# Altium PCB Lab9-10.PcbDoc
Units mil, origin at the board's own origin, x right, y up, seen from the top; angles counter-clockwise.
Board outline 6010 x 2810 mil, 4 copper layers (Top Layer, GND, PWR, Bottom Layer), stack 23.756 mil thick; 121 components, 80 nets, 435 pads, 151 vias.
Unrouted connection lines stored in the file: 110.
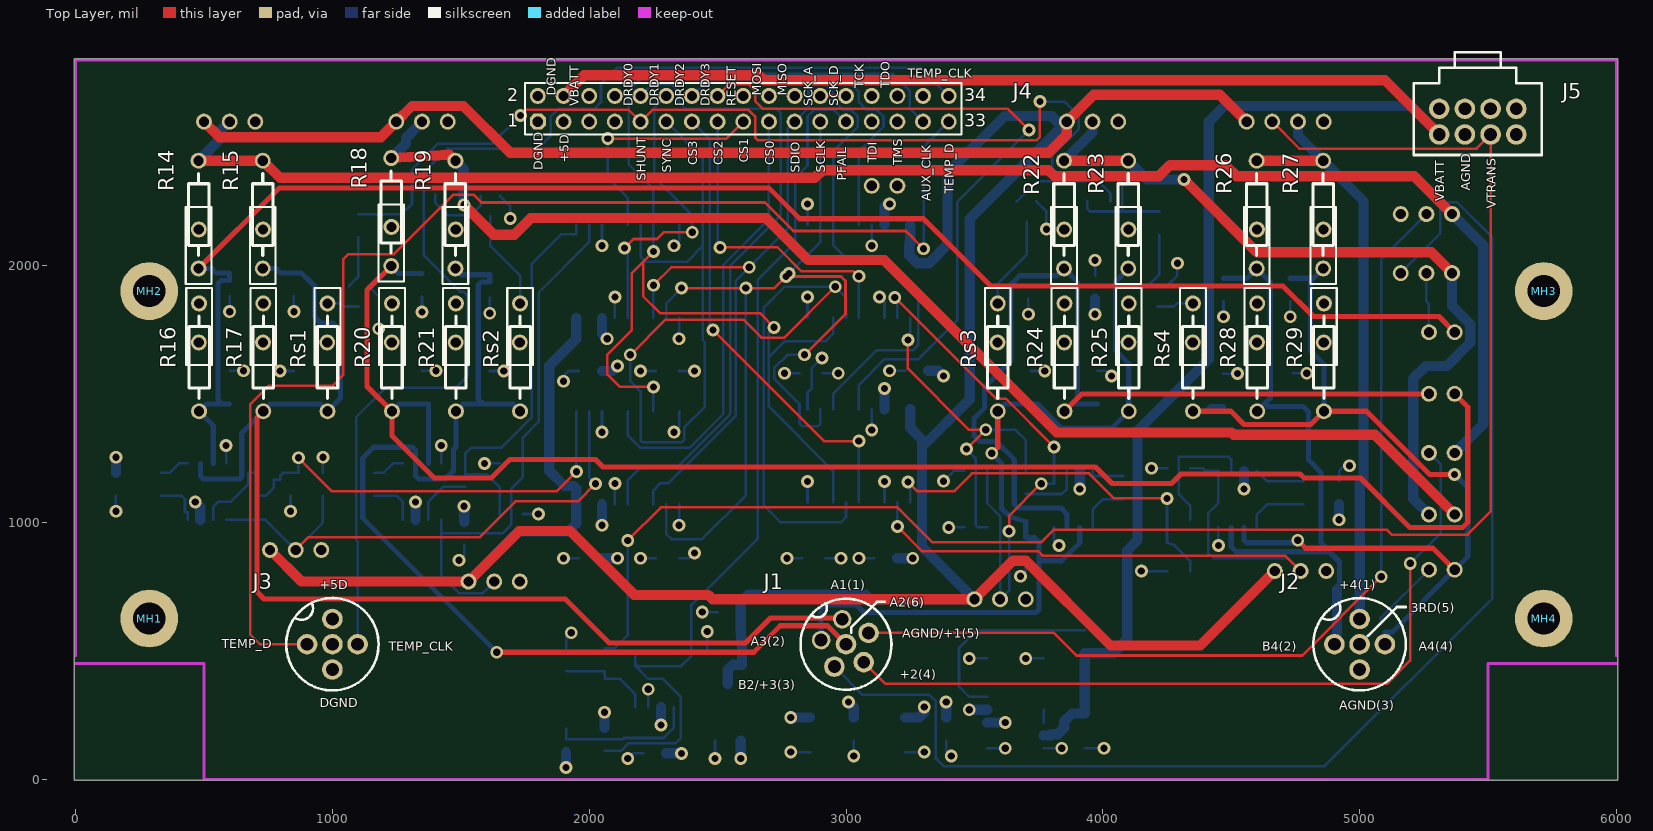
[diagram p0: Top Layer view]
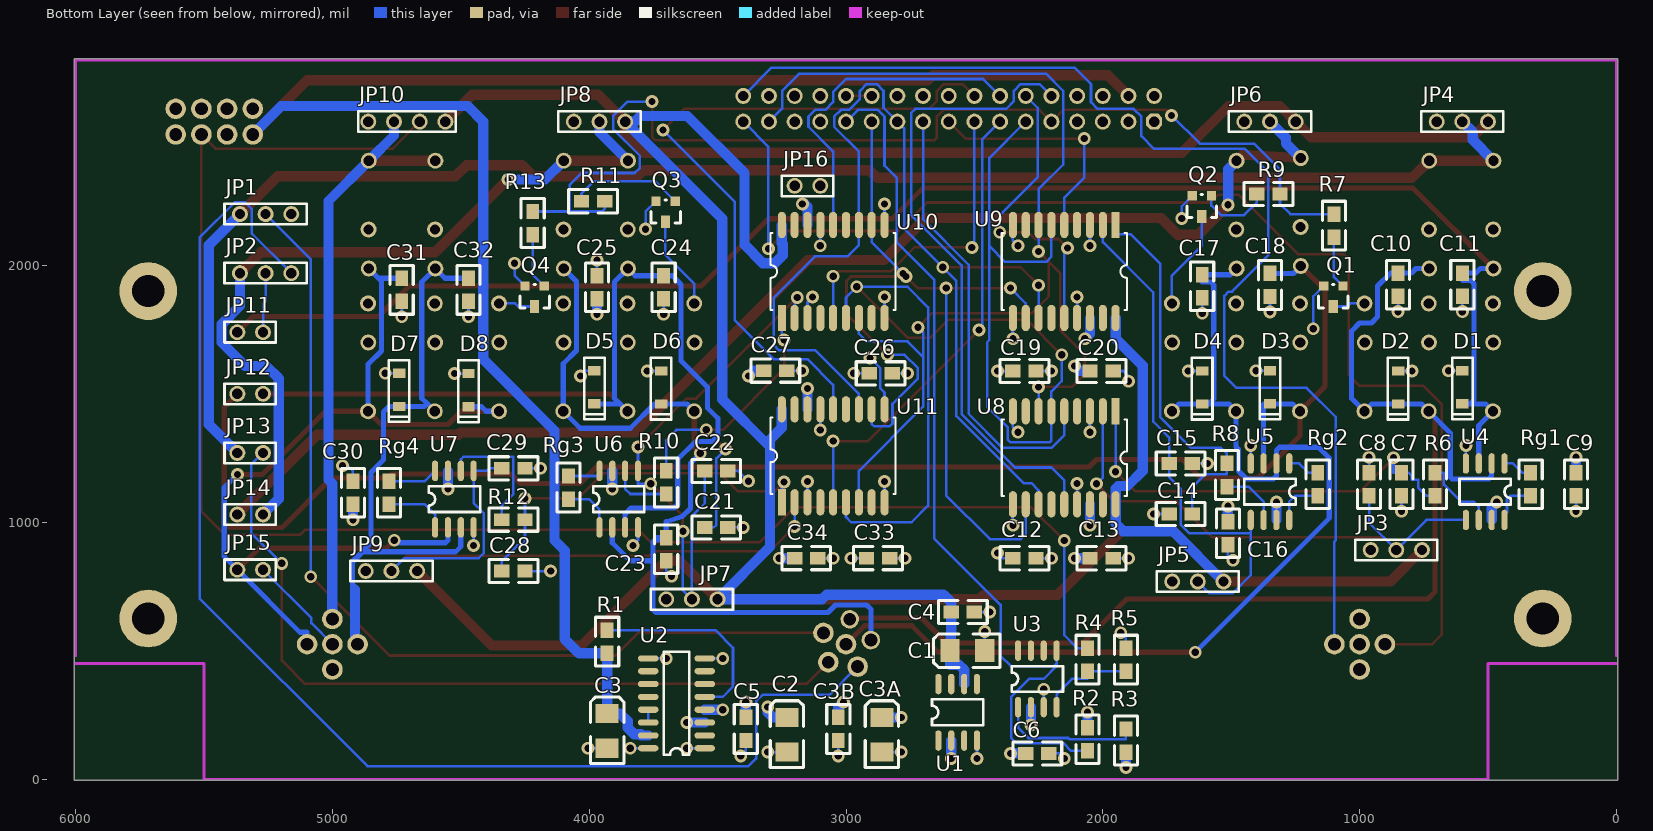
[diagram p1: Bottom Layer view, seen from below]
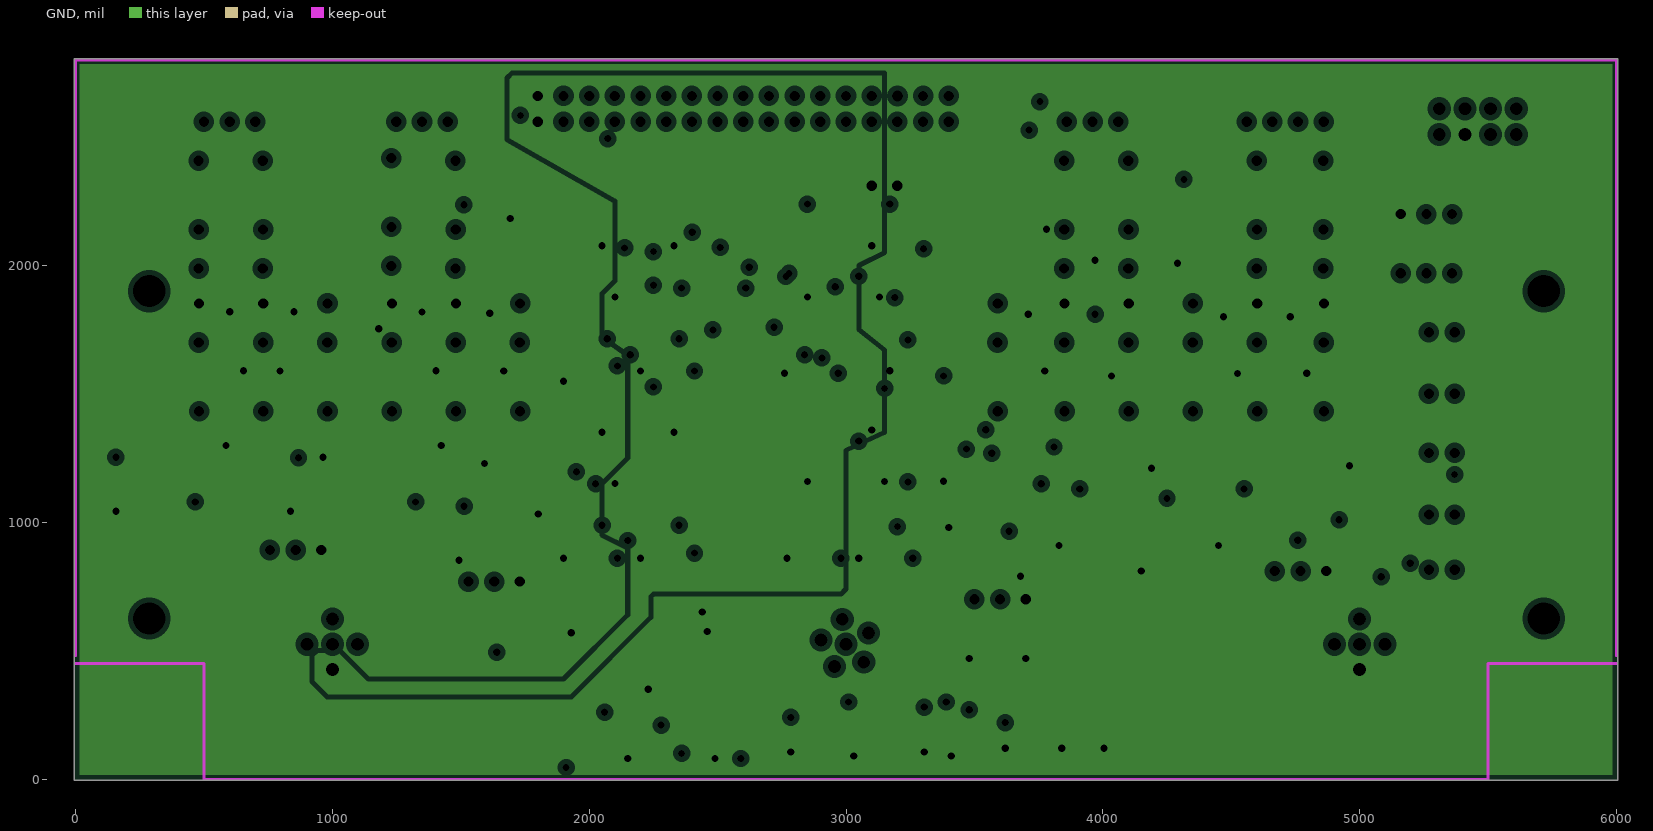
[diagram p2: GND, clearances drawn from the general rule]
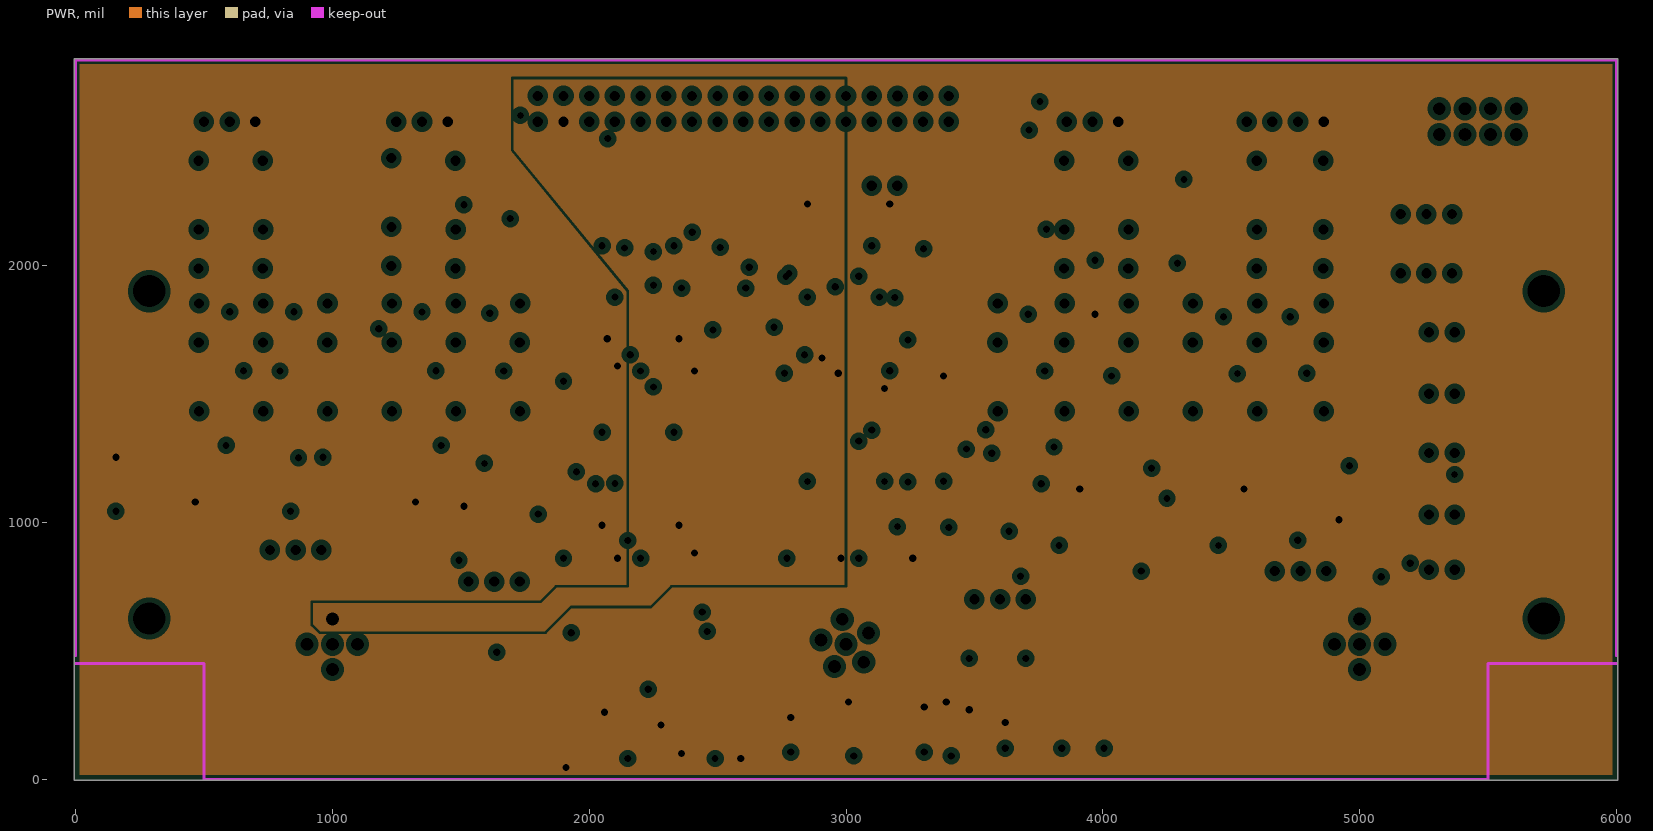
[diagram p3: PWR, clearances drawn from the general rule]

## Layer stack, top to bottom
Top Solder: solder mask 0.4, Solder Resist, Dk 3.5
Top Layer: signal copper 1.4
Dielectric 1: prepreg 2.8, PP-006, Dk 4.1
GND: plane copper 1.378, net AGND
Dielectric1: core 12.6, FR-4, Dk 4.8
PWR: plane copper 1.378, net +5A
Dielectric 2: prepreg 2.8, PP-006, Dk 4.1
Bottom Layer: signal copper 1.4
Bottom Solder: solder mask 0.4, Solder Resist, Dk 3.5

## Board outline
-5,-5 6005,-5 6005,2805 -5,2805

## Design rules (kind name [scope] priority, off if disabled: settings)
Clearance [All] p1: gap=10 ignorepadtopadclearanceinfootprint=TRUE except(0: Arc-Hole Track-Hole SMDPad-Hole THPad-Hole Via-Hole Fill-Hole Poly-Hole Region-Hole Text-Hole)
FabricationTestPointUsage TestPointUsage [All] p1: valid=0 allowmultiple=FALSE
FabricationTestpoint Testpoint [All] p1: side=3 testpointundercomponent=TRUE minsize=40 maxsize=100 preferedsize=60 minholesize=0 maxholesize=40 preferedholesize=32 testpointgrid=1 allowsidetop=TRUE allowsidebottom=TRUE usegrid=TRUE gridtolerance=0.01
PlaneClearance [All] p1: clearance=20
PlaneConnect [All] p1: planeconnectstyle=Relief reliefexpansion=20 reliefentries=4 reliefconductorwidth=10 reliefairgap=10
PolygonConnect [All] p1: connectstyle=Relief reliefconductorwidth=10 reliefentries=4 polygonreliefangle="90 Angle" airgapwidth=10
RoutingVias [All] p1: holewidth=28 width=50 viastyle="Through Hole" minholewidth=28 minwidth=50 maxholewidth=28 maxwidth=50
SilkToSolderMaskClearance SilkscreenOverComponentPads [IsPad] p1: minsilkscreentomaskgap=10 clearancetoexposedcopper=TRUE
SolderMaskExpansion [All] p1: expansion=4 istentingtop=FALSE
Width Power [InNetClass('Power')] p1: maxlimit=40 minlimit=40 preferedwidth=40
Width 2.5V_REF [InNetClass('2.5V_REF')] p2: maxlimit=40 minlimit=20 preferedwidth=40
Width Digital [InNetClass('Digital')] p3: maxlimit=10 minlimit=10 preferedwidth=10
Width Analog [InNetClass('Analog')] p4: maxlimit=40 minlimit=20 preferedwidth=20
Width Basic [All] p5: maxlimit=40 minlimit=10 preferedwidth=10
25 further rules are at their usual default settings.

## Classes and differential pairs
net class Power: +4 +5A NetJP1_1 NetJP2_1 NetJP6_2 VBATT
net class Digital: !CS0 !CS1 !CS2 !CS3 !DB_PFAIL !DRDY0 !DRDY1 !DRDY2 !DRDY3 !DSYNC AUX_CLK SCK_A SCLK SDIO SHUNT_EN TEMP_CLK TEMP_D Vtrans
net class Analog: A1 A2 A3 A4 B4 NetC11_1 NetC18_1 NetC24_1
net class 2.5V_REF: 2.5VREF
component class Lab7-8_TOP: C1 C2 C3 C3A C3B C4 C5 C6 J1 J2 J3 J4 J5 JP1 JP2 JP11 JP12 JP13 JP14 JP15 JP16 MH1 MH2 MH3 MH4 R1 R2 R3 R4 R5 U1 U2 U3
component class CHANNEL4: C28 C29 C30 C31 C32 C33 C34 D7 D8 JP9 JP10 Q4 R12 R13 R26 R27 R28 R29 Rg4 Rs4 U7 U11
component class CHANNEL3: C21 C22 C23 C24 C25 C26 C27 D5 D6 JP7 JP8 Q3 R10 R11 R22 R23 R24 R25 Rg3 Rs3 U6 U10
component class CHANNEL2: C14 C15 C16 C17 C18 C19 C20 D3 D4 JP5 JP6 Q2 R8 R9 R18 R19 R20 R21 Rg2 Rs2 U5 U9
component class CHANNEL1: C7 C8 C9 C10 C11 C12 C13 D1 D2 JP3 JP4 Q1 R6 R7 R14 R15 R16 R17 Rg1 Rs1 U4 U8

## Components (designator, comment, footprint, x,y, rotation, side; value= is the part's Value field where it differs from the comment)
C1 "1uF" 3528 2595,500 r180 bottom
C2 "10uF" 3528 3230,240 r270 bottom
C3 "1uF" 3528 3930,255 r270 bottom
C3A "2.2uF" 3528 2860,240 r270 bottom
C3B "0.1uF" 0805 3030,240 r270 bottom
C4 "0.1uF" 0805 2590,650 r180 bottom
C5 "0.1uF" 0805 3390,240 r270 bottom
C6 "0.1uF" 0805 2300,100 r180 bottom
C7 "0.1uF" 0805 837,1193 r270 bottom
C8 "0.1uF" 0805 963,1103 r90 bottom
C9 "0.1uF" 0805 157,1193 r270 bottom
C10 "0.1uF" 0805 850,1970 r270 bottom
C11 "0.1uF" 0805 600,1970 r270 bottom
C12 "0.1uF" 0805 2350,859.8 r180 bottom
C13 "0.1uF" 0805 2050,859.8 r180 bottom
C14 "0.1uF" 0805 1652,1032 r0 bottom
C15 "0.1uF" 0805 1742,1229 r180 bottom
C16 "0.1uF" 0805 1513,1002 r270 bottom
C17 "0.1uF" 0805 1613,1964 r270 bottom
C18 "0.1uF" 0805 1349,1969 r270 bottom
C19 "0.1uF" 0805 2350,1589 r180 bottom
C20 "0.1uF" 0805 2050,1589 r180 bottom
C21 "0.1uF" 0805 3550,980 r180 bottom
C22 "0.1uF" 0805 3550,1200 r180 bottom
C23 "0.1uF" 0805 3700,940 r270 bottom
C24 "0.1uF" 0805 3710,1960 r270 bottom
C25 "0.1uF" 0805 3970,1870 r90 bottom
C26 "0.1uF" 0805 2910,1580 r180 bottom
C27 "0.1uF" 0805 3320,1590 r180 bottom
C28 "0.1uF" 0805 4340,810 r180 bottom
C29 "0.1uF" 0805 4340,1210 r180 bottom
C30 "0.1uF" 0805 4920,1070 r90 bottom
C31 "0.1uF" 0805 4730,1950 r270 bottom
C32 "0.1uF" 0805 4470,1950 r270 bottom
C33 "0.1uF" 0805 2920,860 r180 bottom
C34 "0.1uF" 0805 3200,860 r180 bottom
D1 "6V2" SOD-123 600,1590 r0 bottom
D2 "6V2" SOD-123 850,1589 r0 bottom
D3 "6V2" SOD-123 1349,1590 r0 bottom
D4 "6V2" SOD-123 1613,1589 r0 bottom
D5 "6V2" SOD-123 3980,1590 r0 bottom
D6 "6V2" SOD-123 3720,1589 r0 bottom
D7 "6V2" SOD-123 4740,1580 r0 bottom
D8 "6V2" SOD-123 4470,1579 r0 bottom
J1 "CON6" FSFD4.6 3000,525 r0 top locked
J2 "CON5" FSFD4.5 5000,525 r0 top locked
J3 "CON5" FSFD4.5 1000,525 r0 top locked
J4 "HEADER 17X2" HDR2X17 1800,2560 r0 top locked
J5 "HEAD 4" 70543-4A 5460,2610 r0 top locked
JP1 "HOLE 3" RAD0.1A 5360,2200 r270 bottom
JP2 "HOLE 3" RAD0.1A 5360,1970 r270 bottom
JP3 "HOLE 3" RAD0.1A 957,892 r270 bottom
JP4 "HOLE 3" RAD0.1A 700,2560 r270 bottom
JP5 "HOLE 3" RAD0.1A 1730,769 r270 bottom
JP6 "HOLE 3" RAD0.1A 1449,2560 r270 bottom
JP7 "HOLE 3" RAD0.1A 3700,700 r270 bottom
JP8 "HOLE 3" RAD0.1A 4060,2560 r270 bottom
JP9 "HOLE 3" RAD0.1A 4870,810 r270 bottom
JP10 "HOLE 4" RAD0.1B 4860,2560 r270 bottom
JP11 "HOLE 2" RAD0.1 5370,1740 r270 bottom
JP12 "HOLE 2" RAD0.1 5370,1500 r270 bottom
JP13 "HOLE 2" RAD0.1 5370,1270 r270 bottom
JP14 "HOLE 2" RAD0.1 5370,1030 r270 bottom
JP15 "HOLE 2" RAD0.1 5370,815 r270 bottom
JP16 "HOLE 2" RAD0.1 3100,2310 r90 bottom
MH1 "Mount-Hole" "screw 4-40"#1 110,1450 r0 top locked
MH2 "Mount-Hole" "screw 4-40"#2 60,3190 r0 top locked
MH3 "Mount-Hole" "screw 4-40"#3 5680,2620 r0 top locked
MH4 "Mount-Hole" "screw 4-40"#4 5710,1620 r0 top locked
Q1 "MOSFET-N1" SOT-23 1065,1920 r180 bottom
Q2 "MOSFET-N1" SOT-23 1577,2271 r180 bottom
Q3 "MOSFET-N1" SOT-23 3665,2250 r180 bottom
Q4 "MOSFET-N1" SOT-23 4175,1920 r180 bottom
R1 "100K" 0805 3930,580 r270 bottom
R2 "10K" 0805 2060,110 r90 bottom
R3 "2.2K" 0805 1910,105 r90 bottom
R4 "y" 0805 2060,510 r270 bottom
R5 "x" 0805 1910,420 r90 bottom
R6 "1K2" 0805 707,1193 r270 bottom
R7 "4K7" 0805 1100,2110 r90 bottom
R8 "1K2" 0805 1517,1139 r90 bottom
R9 "4K7" 0805 1400,2278 r180 bottom
R10 "1K2" 0805 3700,1110 r90 bottom
R11 "4K7" 0805 4030,2250 r180 bottom
R12 "1K2" 0805 4340,1010 r180 bottom
R13 "4K7" 0805 4220,2120 r90 bottom
R14 "bridge R" "bridge resistor" 480,1980 r0 top locked
R15 "bridge R" "bridge resistor" 730,1980 r0 top locked
R16 "bridge R" "bridge resistor" 480,1860 r180 top locked
R17 "bridge R" "bridge resistor" 730,1860 r180 top locked
R18 "bridge R" "bridge resistor" 1230,1990 r0 top locked
R19 "bridge R" "bridge resistor" 1480,1980 r0 top locked
R20 "bridge R" "bridge resistor" 1231,1860 r180 top locked
R21 "bridge R" "bridge resistor" 1480,1860 r180 top locked
R22 "bridge R" "bridge resistor" 3850,1980 r0 top locked
R23 "bridge R" "bridge resistor" 4100,1980 r0 top locked
R24 "bridge R" "bridge resistor" 3850,1860 r180 top locked
R25 "bridge R" "bridge resistor" 4100,1860 r180 top locked
R26 "bridge R" "bridge resistor" 4600,1980 r0 top locked
R27 "bridge R" "bridge resistor" 4859,1980 r0 top locked
R28 "bridge R" "bridge resistor" 4600,1860 r180 top locked
R29 "bridge R" "bridge resistor" 4860,1860 r180 top locked
Rg1 "Rg1" 0805 334,1103 r90 bottom
Rg2 "Rg2" 0805 1163,1103 r90 bottom
Rg3 "Rg3" 0805 4080,1180 r270 bottom
Rg4 "Rg4" 0805 4780,1160 r270 bottom
Rs1 "bridge R" "bridge resistor" 980,1860 r180 top locked
Rs2 "bridge R" "bridge resistor" 1730,1860 r180 top locked
Rs3 "bridge R" "bridge resistor" 3590,1860 r180 top locked
Rs4 "bridge R" "bridge resistor" 4350,1860 r180 top locked
U1 "REF192ES" SO-8 2640,150 r180 bottom
U2 "LP2952AIM" SO-16 3550,120 r0 bottom
U3 "DS1707" SO-8 2330,280 r180 bottom
U4 "INA118" SO-8 436,1229 r0 bottom
U5 "INA118" SO-8 1274,1229 r0 bottom
U6 "INA118" SO-8 3960,980 r180 bottom
U7 "INA118" SO-8 4600,980 r180 bottom
U8 "ADS1212U" SOIC18 1950,1432 r0 bottom
U9 "ADS1212U" SOIC18 1950,2157.8 r0 bottom
U10 "ADS1212U" SOIC18 3250,1795.59 r180 bottom
U11 "ADS1212U" SOIC18 3250,1077.59 r180 bottom

## Footprints (in the part's own frame and the unit in brackets; to place one, negate y for a bottom-side part, rotate by r counter-clockwise, add the part's x,y. Pads: shape width x height; smd on the part's side, far side on the other; paste and mask are expansions set on the pad)
0805 [mil]
  rect 60x50 smd: 1(0,0) 2(90,0)
  silkscreen extent -50,-45 140,45
3528 [mil]
  rect 75x90 smd: 1(0,0) 2(135,0)
  silkscreen extent -65,-65 195,65
70543-4A [mil]
  round 80 hole 50: 1(-150,-100) 1a(-150,0) 2(-50,-100) 2a(-50,0) 3(50,-100) 3a(50,0) 4(150,-100) 4a(150,0)
  silkscreen extent -250,-180 250,220
"bridge resistor" [mil]
  round 62 hole 40: 1(-1,8) 2(-1,428) ""(0,160)
  silkscreen extent -51,-52 49,378
FSFD4.5 [mil]
  round 80 hole 50: 1(0,98.43) 2(-98.42,0) 3(0,-98.42) 4(98.43,0) 5(0,0)
  silkscreen extent -180,-180 180,180
FSFD4.6 [mil]
  round 72 hole 50: 1(-14.66,97.03) 2(-96.81,16.04)
  round 80 hole 50: 3(-45.17,-87.12) 4(68.9,-69.88) 5(87.75,43.93) 6(0,0)
  silkscreen extent -177,-177 177,177
HDR2X17 [mil]
  oct 62x62 hole 40: 1(0,0)
  round 62 hole 40: 2(0,100) 3(100,0) 4(100,100) 5(200,0) 6(200,100) 7(300,0) 8(300,100) 9(400,0) 10(400,100) 11(500,0) 12(500,100) 13(600,0) 14(600,100) 15(700,0) 16(700,100) 17(800,0) 18(800,100) 19(900,0) 20(900,100) 21(1000,0) 22(1000,100) 23(1100,0) 24(1100,100) 25(1200,0) 26(1200,100) 27(1300,0) 28(1300,100) 29(1400,0) 31(1500,0) 32(1500,100) 33(1600,0) 34(1600,100)
  round 62 hole 42: 30(1400,100)
  silkscreen extent -50,-50 1650,150
RAD0.1 [mil]
  round 62 hole 40: 1(0,0) 2(0,100)
  silkscreen extent -40,-50 40,150
RAD0.1A [mil]
  round 62 hole 40: 1(0,0) 2(0,100) 3(0,200)
  silkscreen extent -40,-60 40,260
RAD0.1B [mil]
  round 62 hole 40: 1(0,0) 2(0,100) 3(0,200) 4(0,300)
  silkscreen extent -40,-40 40,340
"screw 4-40"#1 [mil]
  round 225 hole 125: 4-40(177,-825)
"screw 4-40"#2 [mil]
  round 225 hole 125: 4-40(227,-1290)
"screw 4-40"#3 [mil]
  round 225 hole 125: 4-40(37,-720)
"screw 4-40"#4 [mil]
  round 225 hole 125: 4-40(7,-995)
SO-8 [mil]
  oval 24x80 smd: 1(0,0) 2(50,0) 3(100,0) 4(150,0) 5(150,220) 6(100,220) 7(50,220) 8(0,220)
  silkscreen extent -25,60 175,160
SO-16 [mil]
  oval 80x24 smd: 1(0,0) 2(0,-50) 3(0,-100) 4(0,-150) 5(0,-200) 6(0,-250) 7(0,-300) 8(0,-350) 9(220,-350) 10(220,-300) 11(220,-250) 12(220,-200) 13(220,-150) 14(220,-100) 15(220,-50) 16(220,0)
  silkscreen extent 60,-375 160,25
SOD-123 [mil]
  rect 48x36 smd: A(0,0) K(0,129)
  silkscreen extent -40,-51 40,189
SOIC18 [mm]
  rect 0.8x2.6 smd: 1(0,0)
  oval 0.8x2.6 smd: 2(1.27,0) 3(2.54,0) 4(3.81,0) 5(5.08,0) 6(6.35,0) 7(7.62,0) 8(8.89,0) 9(10.16,0) 10(10.16,9.2) 11(8.89,9.2) 12(7.62,9.2) 13(6.35,9.2) 14(5.08,9.2) 15(3.81,9.2) 16(2.54,9.2) 17(1.27,9.2) 18(0,9.2)
  silkscreen extent -1.11,0.8 11.27,8.4
SOT-23 [mil]
  rect 36x36 smd: 1(0,0) 2(-75,0)
  rect 36x50 smd: 3(-38,-80)
  silkscreen extent -95,-85 20,5

## Part data
C1 C2 C3 C3A: library part "CAPACITOR POL", Part Field 1=TANT
C3B C4 C5 C6 C7 C8 C9 C10 C11 C12 C13 C14 C15 C16 C17 C18 C19 C20 C21 C22 C23 C24 C25 C26 C27 C28 C29 C30 C31 C32 C33 C34: library part CAP
D1 D2 D3 D4 D5 D6 D7 D8: library part ZENER3
J4: library part "HEADER 2X17"
J5: library part "HEADER 4"
MH1 MH2 MH3 MH4: library part MountHole, "Mount hole", LatestRevisionDate=17-Jul-2002, LatestRevisionNote="Re-released for DXP Platform.", Publisher="Altium Limited"
R1 R2 R3 R4 R5 R6 R7 R8 R9 R10 R11 R12 R13 Rg1 Rg2 Rg3 Rg4: library part RES1
R14 R15 R16 R17 R18 R19 R20 R21 R22 R23 R24 R25 R26 R27 R28 R29 Rs1 Rs2 Rs3 Rs4: library part RES2
U4 U5 U6 U7: "Precision, Low Power Instrumentation Amplifier"
U8 U9 U10 U11: library part ADS1212U(18), "22-Bit Analog-to-Digital Converter"

## Via types
v1: diameter 50, hole 28, Top Layer to Bottom Layer, 151 vias

## Nets (pads, with @x,y where several pads share a name; then routed paths per layer and width w, separated by ;. In a path a pad name is that pad's centre, name@x,y a point inside that pad or via, vN(x,y) a via of type N, cw(c..) or ccw(c..) an arc to the next point about the centre after c; other vN are vias at no path point)
2.5VREF: C1.1 C4.1 JP3.3 JP4.3 JP5.3 JP6.3 JP7.3 JP8.3 JP9.3 JP10.4 U1.6 U8.18 U9.18 U10.18 U11.18 | length 15066.6
  Top Layer w40: JP4.3 561,2499 1188,2499 JP6.3 1310,2621 1510,2621 1692,2439 3789.88,2439 3860,2509.12 JP8.3 3965,2665 4455,2665 JP10.4 ; JP3.3 880,769 JP5.3 1727,966 1926,966 2175,717 2463,717 2480,700 JP7.3 3650,850 3700,850 4030,520 4380,520 JP9.3
  Bottom Layer w40: JP5.3 1726,965 1920,965 1950,995 U8.18 1950,1131 1940,1141 1904,1141 1845,1200 1845,1610 1950,1715 U9.18 ; U1.6 2540,425 2560,445 2595,445 C1.1 2590,580 C4.1 2590,688.03 2620,718.03 3076,718.03 3094.03,700 JP7.3 3296,904 3296,1293 ; U11.18 3250,1368 3296,1322 3296,1293 ; U10.18 3250,2086 3246,2082 3246,2040 3277,2009 3324,2009 3395,2080 3395,2359 3618,2582 3801,2582 3823,2560 JP8.3 3482,2182 3482,1479 3296,1293
3RD: J2.5 JP15.2 | length 401.8
  Bottom Layer w10: J2.5 5082,607 5082,627 JP15.2
!CS0: J4.19 U8.5 | length 1751.1
  Bottom Layer w10: U8.5 2150,1340 2200,1290 2390,1290 2522,1422 2522,2002 2700,2180 J4.19
!CS1: J4.17 U9.5 | length 923.9
  Top Layer w10: v1(2072,2494) 2534,2494 J4.17
  Bottom Layer w10: v1(2072,2494) 2072,2342 2150,2264 U9.5
!CS2: J4.15 U10.5 | length 1242.9
  Top Layer w10: v1(2510,2070) 2734.23,2070 2827.23,1977 3031,1977 v1(3050,1958)
  Bottom Layer w10: J4.15 2500,2080 v1(2510,2070) ; U10.5 v1(3050,1958)
!CS3: J4.13 U11.5 | length 1830.7
  Top Layer w10: v1(2482,1749) 2915,1316 v1(3050,1316)
  Bottom Layer w10: J4.13 2470,2490 2470,1761 v1(2482,1749) ; U11.5 v1(3050,1316)
!DB_PFAIL: J4.25 R2.1 U3.5 | length 3470.2
  Bottom Layer w10: R2.1 2123,110 2153,140 2337,140 2357,160 2357,320 2287,390 2230,390 2180,440 2180,450 ; U3.5 2180,450 ; J4.25 2954,2606 2876,2606 2850,2580 2850,2389 2802,2341 2802,2090 2657,1945 2657,937 2398,678 2398,480 2358,440 2190,440 2180,450
!DRDY0: J4.10 U8.14 | length 2488.9
  Bottom Layer w10: U8.14 2150,1163.28 2200,1213.28 2341.57,1213.28 2550,1421.71 2550,2000 2746,2196 2746,2594 2730,2610 2376,2610 2346,2640 2346,2680 2320,2706 2246,2706 J4.10
!DRDY1: J4.12 U9.14 | length 1176.6
  Top Layer w10: v1(2138,2068) 2173,2103 2264,2103 2290,2129 v1(2401,2129)
  Bottom Layer w10: v1(2138,2068) 2150,2056 U9.14 ; J4.12 2254,2614 2254,2343 2401,2196 v1(2401,2129)
!DRDY2: J4.14 U10.14 | length 1319.2
  Bottom Layer w10: J4.14 2466,2726 3000,2726 3050,2676 3050,2636 3080,2606 3120,2606 3146,2580 3146,2540 3050,2444 U10.14
!DRDY3: J4.16 U11.14 | length 2768.8
  Top Layer w10: J4.16 2546,2706 2620,2706 2646,2680 2646,2640 2676,2610 3630,2610 v1(3713,2527)
  Bottom Layer w10: U11.14 3050,1535 3150,1635 3282,1635 3433,1786 3433,2247 v1(3713,2527)
!DSYNC: J4.11 U8.6 U9.6 U10.6 U11.6 | length 5204.4
  Top Layer w10: v1(2160,1652) 2297,1789 2601,1789 2671,1719 2760,1719 v1(2958,1917)
  Bottom Layer w10: v1(2160,1652) 2160,1549 2200,1509 U8.6 2200,1319 2208.18,1310.82 2360,1310.82 2370,1320.82 2370,1369.4 2450,1449.4 2450,1701.06 2441.57,1709.48 2441.57,2075.57 ; U9.6 2200,2034 2220,2014 2380,2014 2441.57,2075.57 ; J4.11 2441.57,2418.43 ; U11.6 3000,1020 2980,1000 2745,1000 2680,1065 2680,1837 2760,1917 v1(2958,1917) 3000,1875 U10.6 ; 2441.57,2075.57 2441.57,2418.43 ; 2441.57,2075.57 2442,2076 2442,2418 2441.57,2418.43
!RESET: J4.18
+2a: J1.4 JP13.2 | length 3077.6
  Top Layer w10: J1.4 3153.02,371 5107,371 5197,461 v1(5197,840)
  Bottom Layer w10: v1(5197,840) 5316,959 5316,1224 JP13.2
+4: J2.1 JP10.2 R26.2 R27.2 | length 2307.4
  Top Layer w40: R26.2 R27.2
  Bottom Layer w40: JP10.2 4760,2506 R27.2 5015,2251 5015,1165 5000,1150 J2.1
+5A: C2.1 C3A.1 C3B.1 C5.1 C6.1 C9.1 C13.1 C16.1 C20.1 C25.1 C27.1 C30.1 C34.1 JP4.1 JP6.1 JP8.1 JP10.1 R2.2 R3.1 U1.2 U2.3 U2.4 U3.2 U4.7 U5.7 U6.7 U7.7 U8.16 U9.16 U10.16 U11.16 | length 1898.6
  Bottom Layer w40: C9.1 v1(157,1253) ; v1(466,1079) 486,1059 U4.7 ; U5.7 v1(1324,1079) ; C16.1 v1(1513,1062) ; v1(1910,45) R3.1 ; C13.1 v1(2110,859.8) ; v1(2050,988.61) U8.16 ; C20.1 2090,1589 v1(2110,1609) ; U9.16 2050,1734.41 v1(2070,1714.41) ; R2.2 v1(2060,260) ; v1(2280,210) U3.2 ; C6.1 v1(2360,100) ; v1(2590,80) U1.2 ; v1(2785,240) C3A.1 ; v1(3010,300) 3030,280 C3B.1 ; U11.16 v1(3150,1520.98) ; U10.16 3150,2228.98 3160,2238.98 v1(3170,2238.98) ; C34.1 v1(3260,860) ; C2.1 3285,240 3305,260 v1(3305,280) ; C27.1 3360,1590 v1(3380,1570) ; C5.1 v1(3390,300) ; v1(3480,270) U2.4 ; U2.3 v1(3620,220) ; v1(3910,1130) U6.7 ; v1(3970,1810) C25.1 ; v1(4550,1130) U7.7 ; v1(4920,1010) C30.1
+5D: C12.1 C19.1 C26.1 C33.1 J3.1 J4.3 U8.10 U9.10 U10.10 U11.10 | length 714.9
  Bottom Layer w10: C12.1 2390,859.8 v1(2410,879.8) ; v1(2350,988.61) U8.10 ; C19.1 v1(2410,1589) ; v1(2350,1714.41) U9.10 ; U11.10 2850,1505.12 2866,1521.12 2866,1599.69 v1(2906,1639.69) ; U10.10 v1(2850,2238.98) ; C26.1 v1(2970,1580) ; C33.1 v1(2980,860)
A1: C10.1 D2.K J1.1 R15.1 R17.2 Rs1.2 U4.2 | length 4705.5
  Top Layer w20: R17.2 706,1407 706,729 734,701 1907,701 2078,530 2609,530 2706.04,627.04 2980.33,627.04 J1.1
  Bottom Layer w20: U4.2 486,1180 497,1169 640,1169 647,1176 647,1348 R17.2 759,1460 D2.K 953,1460 Rs1.2 1031,1482 1031,1745 1000,1776 954,1776 930,1800 930,1920 880,1970 C10.1 798,1970 780,1988 R15.1
A2: C17.1 D4.K J1.6 R19.1 R21.2 Rs2.2 U5.2 | length 4101.6
  Top Layer w20: v1(1640,494) 2640.96,494 2744,597.04 2927.96,597.04 J1.6
  Bottom Layer w20: R19.1 1503,1964 C17.1 1613,1936 1580,1936 1568,1924 1568,1480 1588,1460 ; v1(1640,494) 1118,1016 1118,1250 1160,1292 1312,1292 1324,1280 U5.2 1324,1180 1335,1169 1441,1169 1472,1200 1472,1284 1481,1293 R21.2 1509,1460 1588,1460 ; Rs2.2 1703,1460 D4.K 1588,1460
A3: C23.1 D6.K J1.2 R23.1 R25.2 Rs3.2 U6.2 | length 3377.1
  Top Layer w20: v1(3567.5,1268.5) 3591,1292 Rs3.2
  Bottom Layer w20: J1.2 2903.19,661.22 2920,678.03 3041,678.03 3070.03,649 3740,649 3751,660 3751,850 ; v1(3567.5,1268.5) 3606,1230 3606,1053.49 3637.49,1022 3700,1002 C23.1 ; Rs3.2 3619,1460 D6.K 3746,1460 3840,1366 4035,1366 R25.2 4101,1617 4049,1669 4049,1938 R23.1 ; U6.2 3910,920 3840,850 3751,850 ; C23.1 3751,924 ; C23.1 3735,940 3751,924 ; 3751,850 3751,924
A4: C31.1 D8.K J2.4 JP15.1 R27.1 R29.2 Rs4.2 U7.2 | length 3735.6
  Top Layer w20: Rs4.2 4499,1432 4550,1381 4810,1381 R29.2 5027,1432 5273,1186 v1(5370,1186) ; v1(4759,930) 4790,899 5286,899 JP15.1
  Bottom Layer w20: Rs4.2 4401,1432 4419,1450 D8.K ; U7.2 4550,930 4560,920 4749,920 v1(4759,930) ; C31.1 4820,1950 ; R27.1 4820,1950 ; R29.2 4861,1615 4809,1667 4809,1939 4820,1950 ; J2.4 5098.43,571.67 5126.67,571.67 JP15.1 5421,866 5421,1135 v1(5370,1186)
AGND: C1.2 C2.2 C3.2 C3A.2 C3B.2 C4.2 C5.2 C6.2 C7.2 C8.2 C9.2 C10.2 C11.2 C13.2 C14.2 C15.2 C16.2 C17.2 C18.2 C20.2 C21.2 C22.2 C23.2 C24.2 C25.2 C27.2 C28.2 C29.2 C30.2 C31.2 C32.2 C34.2 D1.A D2.A D3.A D4.A D5.A D6.A D7.A D8.A J2.3 J5.2 JP1.3 JP3.1 JP5.1 JP7.1 JP9.1 JP16.2 Q1.2 Q2.2 Q3.2 Q4.2 R5.2 R16.1 R17.1 R20.1 R21.1 R24.1 R25.1 R28.1 R29.1 U1.4 U2.1 U2.8 U2.9 U2.16 U3.3 U4.4 U5.4 U6.4 U7.4 U8.3 U9.3 U10.3 U11.3 | length 4222
  Bottom Layer w10: v1(157,1043) C9.2 ; U4.4 v1(586,1299) ; D1.A v1(654,1590) ; v1(600,1820) C11.2 ; v1(796,1589) D2.A ; v1(837,1043) C7.2 ; v1(850,1820) C10.2 ; C8.2 v1(963,1253) ; Q1.2 1180.5,1879.5 v1(1180.5,1753.29) ; D3.A v1(1403,1590) ; v1(1349,1819) C18.2 ; U5.4 v1(1424,1299) ; v1(1493,852) 1513,872 C16.2 ; v1(1592,1229) C15.2 ; D4.A v1(1667,1589) ; v1(1613,1814) C17.2 ; Q2.2 1692.5,2230.5 v1(1692.5,2182.29) ; C14.2 v1(1802,1032) ; v1(1900,859.8) C13.2 ; v1(1900,1549) 1900,1569 1920,1589 C20.2 ; R5.2 1910,560 1920,570 v1(1930,570) ; v1(2050,1350.82) U8.3 ; v1(2050,2076.61) U9.3 ; v1(2150,80) 2170,100 C6.2 ; U3.3 v1(2230,350) ; v1(2440,650) C4.2 ; C1.2 v1(2460,575) ; v1(2490,80) U1.4 ; v1(2785,105) C3A.2 ; v1(3030,90) C3B.2 ; v1(3050,860) C34.2 ; v1(3130,1876.77) 3150,1856.77 U10.3 ; U11.3 v1(3150,1158.77) ; v1(3170,1590) C27.2 ; C2.2 v1(3305,105) ; v1(3380,1160) 3420,1200 C22.2 ; C5.2 3390,110 v1(3410,90) ; v1(3400,980) C21.2 ; v1(3480,470) U2.8 ; U2.1 v1(3620,120) ; v1(3680,790) 3700,810 C23.2 ; v1(3700,470) U2.9 ; v1(3710,1810) C24.2 ; D6.A v1(3774,1589) ; Q3.2 3780.5,2209.5 v1(3780.5,2141.29) ; U2.16 v1(3840,120) ; U6.4 3810,930 v1(3830,910) ; C3.2 v1(4005,120) ; C25.2 v1(3970,2020) ; D5.A 4014,1590 v1(4034,1570) ; v1(4150,810) C28.2 ; v1(4190,1210) C29.2 ; Q4.2 4290.5,1960.5 v1(4290.5,2008.71) ; v1(4450,910) U7.4 ; D8.A v1(4524,1579) ; v1(4470,1800) C32.2 ; v1(4730,1800) C31.2 ; D7.A v1(4794,1580) ; C30.2 4920,1200 4940,1220 v1(4960,1220)
AGND/+1: J1.5 JP1.2 | length 3644.7
  Top Layer w10: J1.5 3809.07,568.93 3897,481 4777,481 v1(5084,788)
  Bottom Layer w10: v1(5084,788) 5084,2024 JP1.2
AUX_CLK: J4.31 U8.7 U9.7 U10.7 U11.7 | length 4640.1
  Top Layer w10: v1(2250,1527) 2120,1527 2070,1577 2070,1652 2165,1747 2165,1969 2210,2014 ; v1(2250,2054) 2210,2014 ; v1(2720,1759) 2665,1814 2276,1814 2210,1880 2210,2014
  Bottom Layer w10: U8.7 v1(2250,1527) ; v1(2250,2054) U9.7 2250,2297 2154,2393 2154,2680 2220,2746 3183,2746 3249,2680 3249,2611 J4.31 ; v1(2720,1759) 2700,1739 2700,1644 ; U11.7 2950,1200.2 2700,1450.2 2700,1644 ; U10.7 2950,1734 2920,1704 2760,1704 2700,1644
B2/+3: J1.3 JP2.3 | length 5113.4
  Bottom Layer w10: J1.3 3064.71,328 3325,328 3350,303 3350,80 3380,50 4864,50 5516,702 5516,2110 5380,2246 5340,2246 5314,2220 5314,2124 JP2.3
B4: C32.1 D7.K J2.2 R26.1 R28.2 U7.3 | length 2632.5
  Bottom Layer w20: C32.1 4561,1950 R26.1 4652,1935 4652,1483 4631,1462 ; U7.3 4500,905 4520,885 4880,885 4921,844 ; R28.2 4631,1462 ; J2.2 J2.2@4901.58,557 ; 4631,1462 4642,1451 D7.K 4780,1451 4801,1430 4801,1243 4850,1194 4850,920 4921,849 4921,844 ; J2.2@4901.58,557 4921,557 4921,759 ; J2.2@4901.58,557 4901.58,739.58 4921,759 ; 4921,759 4921,844
DGND: C12.2 C19.2 C26.2 C33.2 J3.3 J4.1 J4.2 JP16.1 U8.9 U8.15 U9.9 U9.15 U10.9 U10.15 U11.9 U11.15 | length 906
  Bottom Layer w10: U8.15 v1(2100,1150.98) ; U9.15 v1(2100,1876.77) ; v1(2200,859.8) C12.2 ; v1(2200,1589) C19.2 ; v1(2330,1350.82) 2350,1370.82 U8.9 ; v1(2330,2076.61) 2350,2096.61 U9.9 ; v1(2760,1580) C26.2 ; v1(2770,860) C33.2 ; U11.9 v1(2850,1158.77) ; U10.9 v1(2850,1876.77) ; v1(3100,1358.61) U11.15 ; v1(3100,2076.61) U10.15
MISO: J4.22
MOSI: J4.20
NetC7_1: C7.1 R6.2 U8.1 | length 1685.8
  Top Layer w10: v1(868,1251) 999,1120 1873,1120 v1(1950,1197)
  Bottom Layer w10: R6.2 740,1103 772,1135 772,1165 797,1165 797,1180 810,1193 C7.1 868,1193 v1(868,1251) ; v1(1950,1197) U8.1
NetC8_1: C8.1 JP3.2 U4.5 U8.2 | length 2141.6
  Top Layer w10: JP3.2 907,942 1574,942 1713,1081 1956,1081 v1(2025,1150)
  Bottom Layer w10: U4.5 740,1009 JP3.2 963,998 C8.1 ; U8.2 2000,1175 v1(2025,1150)
NetC11_1: C11.1 D1.K JP11.1 R14.1 R16.2 U4.3 | length 6291.5
  Top Layer w20: R14.1 792,2301 2700.73,2301 2819.73,2182 3302,2182 3564,1920 4701,1920 4820,1801 5309,1801 JP11.1
  Bottom Layer w20: R14.1 530,1988 548,1970 C11.1 600,1942 567,1942 555,1930 555,1476 570,1461 ; U4.3 536,1377 R16.2 510,1461 570,1461 ; D1.K 570,1461
NetC14_1: C14.1 R8.2 U9.1 | length 1512.2
  Bottom Layer w10: C14.1 1652,1135 1600,1187 1517,1187 R8.2 1517,1267 1540,1290 1657,1290 1777,1410 1777,2007 1892,2122 1950,2122 U9.1
NetC15_1: C15.1 JP5.2 U5.5 U9.2 | length 2048.3
  Bottom Layer w10: U5.5 1424,957 ; JP5.2 1584,723 1495,723 1424,794 1424,957 ; U9.2 2000,2091 1803.59,1894.59 1803.59,1391.59 1742,1330 C15.1 1742,1176 1697,1131 1697,992 1662,957 1424,957
NetC18_1: C18.1 D3.K JP12.1 R18.1 R20.2 U5.3 | length 6214.7
  Top Layer w20: R18.1 1135,1904 1135,1529 R20.2 1232,1337 1396,1173 1620,1173 1691.03,1244.03 2025,1244.03 2054.03,1215 3971.9,1215 4035.9,1151 4267,1151 4304,1188 4768,1188 4784,1172 5003,1172 5196,979 5400,979 5421,1000 5421,1449 JP12.1
  Bottom Layer w20: R18.1 1258,1969 C18.1 ; R20.2 1261,1461 D3.K 1374,1461 U5.3
NetC21_1: C21.1 R10.2 U10.1 | length 1360.6
  Top Layer w10: v1(3241,1710) 3241,1598 3479,1360 v1(3544,1360) v1(3469,1285)
  Bottom Layer w10: v1(3241,1710) 3250,1719 U10.1 ; v1(3469,1285) 3505,1249 3505,990 3515,980 C21.1 ; v1(3544,1360) 3660,1360 3700,1320 R10.2
NetC22_1: C22.1 JP7.2 U6.5 U10.2 | length 2174.6
  Top Layer w10: v1(3190,1875) 3584,1481 3622,1481 v1(3810,1293) ; v1(3635,965) 3635,1025 v1(3760,1150)
  Bottom Layer w10: v1(3190,1875) 3200,1865 U10.2 ; C22.1 3550,1074 3600,1024 JP7.2 3635,735 v1(3635,965) ; v1(3760,1150) 3810,1150 U6.5 v1(3810,1293)
NetC24_1: C24.1 D5.K JP12.2 R22.1 R24.2 U6.3 | length 3669.9
  Top Layer w20: R24.2 3919,1500 JP12.2
  Bottom Layer w20: R24.2 3880,1461 ; U6.3 3860,1032 3836.94,1055.06 3669.94,1055.06 3655,1070 3655,1245 3585.46,1314.54 3520,1314.54 3499,1335.54 3499,1405 3540,1446 3540,1527 3642,1629 3642,1926 3676,1960 C24.1 3821,1960 R22.1 3902,1935 3902,1483 3880,1461 ; D5.K 3880,1461
NetC28_1: C28.1 R12.2 U11.1 | length 1506.1
  Top Layer w10: v1(3241,1157) 3278,1120 3420,1120 3490,1190 3946.86,1190 4043.86,1093 v1(4250,1093)
  Bottom Layer w10: v1(3241,1157) 3250,1148 U11.1 ; v1(4250,1093) R12.2 4250,920 4280,910 4340,850 C28.1
NetC29_1: C29.1 JP9.2 U7.5 U11.2 | length 2576
  Top Layer w10: v1(3200,983) 3296,887 3749,887 3766,870 4710,870 JP9.2
  Bottom Layer w10: v1(3200,983) U11.2 ; C29.1 4390,1210 4400,1200 U7.5 4450,1075 4410,1035 4410,880 4430,860 4720,860 JP9.2
NetJP1_1: JP1.1 JP4.2 JP13.1 R14.2 R15.2 | length 6256.2
  Top Layer w40: R14.2 R15.2 796,2341 2879,2341 2909,2371 3788,2371 3812,2347 4217.92,2347 4261.3,2390.38 4477.45,2390.38 4520.83,2347 5213,2347 JP1.1
  Bottom Layer w40: R14.2 560,2489 560,2520 JP4.2 ; JP1.1 5481,2079 5481,1381 JP13.1
NetJP2_1: JP2.1 JP8.2 JP14.2 R22.2 R23.2 | length 3025.1
  Top Layer w40: R22.2 R23.2 ; v1(4316,2335) 4600,2051 5279,2051 JP2.1
  Bottom Layer w40: R22.2 3960,2519 JP8.2 ; R23.2 4172,2335 v1(4316,2335) ; JP14.2 5209,1091 5209,1560 5257,1608 5339,1608 5431,1700 5431,1771 5360,1842 JP2.1
NetJP2_2: JP2.2 JP11.2 | length 234.1
  Bottom Layer w10: JP2.2 5260,1860 5270,1850 JP11.2
NetJP6_2: JP6.2 JP14.1 R18.2 R19.2 | length 5048.5
  Top Layer w40: R18.2 1455.5,2431.5 R19.2 ; v1(1512,2236) 1628,2120 1708,2120 1772.47,2184.47 2689.75,2184.47 2853.23,2021 3149.42,2021 3820.84,1349.58 4501.42,1349.58 4510,1341 5059,1341 JP14.1
  Bottom Layer w40: R18.2 1287,2476 1287,2498 JP6.2 ; R19.2 1512,2375 v1(1512,2236)
NetQ1_1: Q1.1 R7.1 | length 204.5
  Bottom Layer w10: Q1.1 1100,1955 R7.1
NetQ1_3: Q1.3 Rs1.1 | length 127
  Bottom Layer w10: Rs1.1 1036,1852 1048,1840 Q1.3
NetQ2_1: Q2.1 R9.1 | length 283.1
  Bottom Layer w10: R9.1 1400,2245.95 1449.95,2196 1540,2196 1577,2233 Q2.1
NetQ2_3: Q2.3 Rs2.1 | length 387
  Bottom Layer w10: Q2.3 1615,2076 1731,1960 Rs2.1
NetQ3_1: Q3.1 R11.1 | length 446.4
  Bottom Layer w10: Q3.1 3742,2327 3983,2327 4030,2280 R11.1
NetQ3_3: Q3.3 Rs3.1 | length 364.4
  Bottom Layer w10: Rs3.1 3591,1929 3703,2041 Q3.3
NetQ4_1: Q4.1 R13.1 | length 218.6
  Bottom Layer w10: Q4.1 4220,1965 R13.1
NetQ4_3: Q4.3 Rs4.1 | length 143
  Bottom Layer w10: Q4.3 4276,1840 4288,1852 Rs4.1
NetR1_1: R1.1 U2.5 | length 796.1
  Bottom Layer w10: U2.5 3480,320 3440,360 3440,511 3509,580 R1.1
NetR3_2: R3.2 U3.1 | length 558.6
  Bottom Layer w10: R3.2 1910,155 2130,155 2135,160 2290,160 2330,200 U3.1
NetR4_2: R4.2 R5.1 U3.4 | length 374.9
  Bottom Layer w10: R5.1 R4.2 2060,390 2120,390 2180,330 U3.4
NetR6_1: R6.1 U4.6 | length 304
  Bottom Layer w10: U4.6 536,1060 556,1080 605,1080 672,1147 672,1193 R6.1
NetR8_1: R8.1 U5.6 | length 238.4
  Bottom Layer w10: U5.6 1374,1080 1433,1139 R8.1
NetR10_1: R10.1 U6.6 | length 238.3
  Bottom Layer w10: R10.1 3840,1110 3860,1130 U6.6
NetR12_1: R12.1 U7.6 | length 517.8
  Bottom Layer w10: R12.1 4340,1065 4295,1110 4295,1255 4490,1255 4500,1245 U7.6
NetRg1_1: Rg1.1 U4.8 | length 188.4
  Bottom Layer w10: Rg1.1 413,1103 426,1090 426,1039 436,1039 U4.8
NetRg1_2: Rg1.2 U4.1 | length 116.9
  Bottom Layer w10: Rg1.2 367,1193 403,1229 U4.1
NetRg2_1: Rg2.1 U5.8 | length 191.5
  Bottom Layer w10: Rg2.1 1251,1103 1274,1080 U5.8
NetRg2_2: Rg2.2 U5.1 | length 125.9
  Bottom Layer w10: Rg2.2 1200,1193 1236,1229 U5.1
NetRg3_1: Rg3.1 U6.8 | length 140
  Bottom Layer w10: U6.8 3960,1180 Rg3.1
NetRg3_2: Rg3.2 U6.1 | length 206.6
  Bottom Layer w10: U6.1 3960,1050 4000,1090 Rg3.2
NetRg4_1: Rg4.1 U7.8 | length 196.6
  Bottom Layer w10: U7.8 4640,1160 Rg4.1
NetRg4_2: Rg4.2 U7.1 | length 246.6
  Bottom Layer w10: U7.1 4600,1030 4640,1070 Rg4.2
NetU2_13: U2.13 U2.14 | length 50
  Bottom Layer w10: U2.14 U2.13
SCK_A: J4.24 J4.26 | length 100
  Top Layer w10: J4.24 J4.26
SCLK: J4.23 U8.11 U9.11 U10.11 U11.11 | length 3666.8
  Top Layer w10: v1(2360,1912) v1(2610,1912) 2721,1912 v1(2766,1957) ; v1(2778,1969) 2790,1957 2981,1957 2998,1940 2998,1811 v1(2839,1652)
  Bottom Layer w10: U8.11 2300,954 2320,934 2440,934 2610,1104 v1(2610,1912) ; U9.11 2300,1852 v1(2360,1912) ; v1(2766,1957) v1(2778,1969) 2900,2091 U10.11 J4.23 ; v1(2839,1652) 2772,1652 2720,1600 2720,1560 2819,1461 2819,1384 2830,1373 2890,1373 2900,1383 U11.11
SDIO: J4.21 U8.12 U9.12 U10.12 U11.12 | length 4505.6
  Top Layer w10: v1(2250,1923) 2320,1993 v1(2623,1993)
  Bottom Layer w10: U8.12 2250,1124 2278,1152 2308.57,1152 2570,1413.43 2570,1940.29 2774,2144.29 ; U9.12 v1(2250,1923) ; v1(2623,1993) 2774,2144 2774,2144.29 ; U11.12 2950,1500 3119.41,1669.41 3260,1669.41 3281,1690.41 3281,1875 3121,2035 2995,2035 2950,2080 U10.12 2950,2444 3046,2540 3046,2580 3020,2606 2988,2606 2946,2648 2946,2680 2920,2706 2880,2706 2854,2680 2854,2614 J4.21 2774,2534 2774,2144.29
SHUNT_EN: J4.9 R7.2 R9.2 R11.2 R13.2 | length 4317.3
  Top Layer w10: v1(1732,2584) 1754,2606 2154,2606 J4.9 2246,2606 2620,2606 2646,2580 2646,2498 2657,2487 3742,2487 3755,2500 v1(3755,2638)
  Bottom Layer w10: R7.2 1270,2200 1310,2240 R9.2 1310,2372.86 1411.14,2474 1622,2474 v1(1732,2584) ; v1(3755,2638) 3851,2638 3906,2583 3906,2530.05 3803,2427.05 3803,2380 3823,2360 4030,2360 4075,2315 4075,2210 ; R11.2 3940,2220 3950,2210 4075,2210 ; R13.2 4075,2210
TCK: J4.28
TDI: J4.27
TDO: J4.30
TEMP_CLK: J3.4 J4.34 | length 4603.5
  Bottom Layer w10: J3.4 1098.43,924.57 1093,930 1093,1410 1206,1523 1480,1523 1527,1570 1527,1881 1510,1898 1497,1898 1355,2040 1355,2362 1447,2454 1800,2454 1850,2504 1850,2580 1880,2610 2020,2610 2046,2636 2046,2706 2110,2770 3290,2770 J4.34
TEMP_D: J3.2 J4.33 | length 4980.1
  Top Layer w10: J3.2 718,525 681,562 681,1460 752,1531 1000,1531 1042,1573 1042,2024 1062,2044 1240,2044 1472,2276 1549,2276 1580,2245 2684,2245 2795,2134 3233,2134 v1(3302,2065)
  Bottom Layer w10: v1(3302,2065) 3302,2462 J4.33
TMS: J4.29
VBATT: C3.1 J4.4 J5.1 R1.2 U2.15 | length 7290.3
  Top Layer w40: J4.4 1981,2741 2661,2741 2681,2721 5099,2721 J5.1
  Bottom Layer w40: U2.15 3798,170 3798,175 3825,175 3850,200 3850,225 3880,255 C3.1 R1.2 4040,490 4095,545 4095,890 4135,930 4135,1357 4412,1634 4412,2560 4473,2621 5199,2621 J5.1
VTRANS: J5.3 JP10.3 R4.1 | length 6398.4
  Top Layer w10: v1(2150,929) 2279,1058 3200,1058 3336,922 3760,922 3808,970 5107,970 5125,952 5420,952 5510,1042 J5.3 5455,2455 4765,2455 JP10.3
  Bottom Layer w10: R4.1 2100,510 2150,560 v1(2150,929)
pads on no net: J3.5 J4.5 J4.6 J4.7 J4.8 J4.32 J5.1a J5.2a J5.3a J5.4 J5.4a MH1.4-40 MH2.4-40 MH3.4-40 MH4.4-40 R14. R15. R16. R17. R18. R19. R20. R21. R22. R23. R24. R25. R26. R27. R28. R29. Rs1. Rs2. Rs3. Rs4. U1.1 U1.3 U1.5 U1.7 U1.8 U2.2 U2.6 U2.7 U2.10 U2.11 U2.12 U3.6 U3.7 U3.8 U8.4 U8.8 U8.13 U8.17 U9.4 U9.8 U9.13 U9.17 U10.4 U10.8 U10.13 U10.17 U11.4 U11.8 U11.13 U11.17

## Polygon pours and split planes (outlines as drawn)
+5D on PWR (split plane): 2994.9,755.1 2320,755.1 2318.05,754.71 2316.4,753.6 2237.89,675.1 1930,675.1 1928.05,674.71 1926.4,673.6 1827.89,575.1 952.11,575.1 925.1,602.11 925.1,684.9 1810,684.9 1811.95,685.29 1813.6,686.4 1872.11,744.9 2150,744.9 2151.95,745.29 2153.6,746.4 2154.71,748.05 2155.1,750 2155.1,1900 2154.95,1900.73 2154.88,1901.47 2154.76,1901.7 2154.71,1901.95 2154.3,1902.57 2153.95,1903.23 1705.1,2451.82 1705.1,2724.9 2994.9,2724.9
+5A on PWR (split plane): 5984.9,15.1 15.1,15.1 15.1,2784.9 5984.9,2784.9
DGND on GND (split plane): 163 vertices, not listed, extent 930.09,330.09 3139.91,2739.91
AGND on GND (split plane): 5984.9,15.1 15.1,15.1 15.1,2784.9 5984.9,2784.9

## Keep-outs
Keep-Out Layer:
  lines w10: 0,450 500,450 500,0 5500,0 5500,450 6000,450 ; 0,480 0,2800 6000,2800 ; 6000,480 6000,2500 ; 6000,2500 6000,2800 ; 6000,2500 6000,2800

## Other copper
GND (plane layer: these items are gaps in the copper):
  lines w20: 920,380 980,320 1930,320 2240,630 2240,710 2250,720 2980,720 3000,740 3000,1280 3150,1350 3150,1670 3050,1750 3050,2000 3150,2050 3150,2300 3150,2500 3150,2750 1720,2750 1700,2750 1680,2730 1680,2490 2100,2250 2100,1940 2050,1890 2050,1720 2150,1650 2150,1250 2050,1150 2050,950 2150,900 2150,760 2150,730 2150,640 1900,390 1140,390 1030,500 940,500 920,480 920,380
PWR (plane layer: these items are gaps in the copper):
  lines w10: 920,600 950,570 1830,570 1930,670 2240,670 2320,750 3000,750 3000,2730 1700,2730 1700,2450 2150,1900 2150,750 1870,750 1810,690 920,690 920,600

## Silkscreen, mask and mechanical layers (free items; w line width, h text height)
Top Overlay:
  lines w10: 3020,570 3020,590 3120,690 3150,690 ; 5035,560 5032.5,557.5 5145,670 5180,670
  text "TEMP_CLK" at 3240,2730 h35
  text "TCK" at 3070,2690 h35 r90
  text "TDO" at 3170,2690 h35 r90
  text "DGND" at 1870,2660 h35 r90
  text "MOSI" at 2670,2660 h35 r90
  text "MISO" at 2770,2660 h35 r90
  text "VBATT" at 1960,2620 h35 r90
  text "DRDY0" at 2170,2620 h35 r90
  text "DRDY1" at 2270,2620 h35 r90
  text "DRDY2" at 2370,2620 h35 r90
  text "DRDY3" at 2470,2620 h35 r90
  text "RESET" at 2570,2620 h35 r90
  text "SCK_A" at 2870,2620 h35 r90
  text "SCK_D" at 2970,2620 h35 r90
  text "+5D" at 1920,2400 h35 r90
  text "CS1" at 2620,2400 h35 r90
  text "TDI" at 3120,2400 h35 r90
  text "CS3" at 2420,2390 h35 r90
  text "CS2" at 2520,2390 h35 r90
  text "CS0" at 2720,2390 h35 r90
  text "TMS" at 3220,2390 h35 r90
  text "DGND" at 1820,2370 h35 r90
  text "SYNC" at 2320,2360 h35 r90
  text "SDIO" at 2820,2360 h35 r90
  text "SCLK" at 2920,2360 h35 r90
  text "SHUNT" at 2220,2330 h35 r90
  text "PFAIL" at 3000,2330 h35 r90
  text "AGND" at 5430,2290 h35 r90
  text "TEMP_D" at 3420,2280 h35 r90
  text "AUX_CLK" at 3330,2250 h35 r90
  text "VBATT" at 5330,2250 h35 r90
  text "VTRANS" at 5530,2220 h35 r90
  text "+5D" at 950,740 h35
  text "A1(1)" at 2940,740 h35
  text "+4(1)" at 4920,740 h35
  text "A2(6)" at 3170,670 h35
  text "3RD(5)" at 5200,650 h35
  text "AGND/+1(5)" at 3220,550 h35
  text "A3(2)" at 2630,520 h35
  text "TEMP_D" at 570,510 h35
  text "TEMP_CLK" at 1220,500 h35
  text "B4(2)" at 4620,500 h35
  text "A4(4)" at 5230,500 h35
  text "+2(4)" at 3210,390 h35
  text "B2/+3(3)" at 2580,350 h35
  text "DGND" at 950,280 h35
  text "AGND(3)" at 4920,270 h35
Mechanical 1:
  lines w10: 30,450 70,450 ; 500,0 5500,0 5500,450 5625,450 5875,450 6000,450 6000,2500 ; 500,0 500,450 ; 500,0 500,450 ; 500,450 0,450 0,2800 6000,2800 ; 6000,2500 6000,2800 ; 6000,2500 6000,2800
Mechanical 2:
  lines w10: -10,0 10,0 ; -10,450 10,450 ; 0,-10 0,10 ; 0,440 0,460 ; 277,625 297,625 ; 277,1900 297,1900 ; 287,615 287,635 ; 287,1890 287,1910 ; 990,525 1010,525 ; 1000,515 1000,535 ; 1790,2560 1810,2560 ; 1800,2550 1800,2570 ; 2990,525 3010,525 ; 3000,515 3000,535 ; 4990,525 5010,525 ; 5000,515 5000,535 ; 5697,1900 5717,1900 ; 5707,1890 5707,1910 ; 5990,2800 6010,2800 ; 6000,2790 6000,2810 ; 6030,440 6050,440 ; 6040,430 6040,450 ; 6040,610 6060,610 ; 6050,600 6050,620
  text "6000,2800 (mil)" at 6010,2800 h60
  text "1800,2560 (mil)" at 1810,2560 h60
  text "287,1900 (mil)" at 297,1900 h60
  text "5707,1900 (mil)" at 5717,1900 h60
  text "287,625 (mil)" at 297,625 h60
  text "6050,610 (mil)" at 6060,610 h60
  text "1000,525 (mil)" at 1010,525 h60
  text "3000,525 (mil)" at 3010,525 h60
  text "5000,525 (mil)" at 5010,525 h60
  text "0,450 (mil)" at 10,450 h60
  text "6040,440 (mil)" at 6050,440 h60
  text "0,0 (mil)" at 10,0 h60

## Text inside footprints (layer, text, board x,y; h text height)
J4: Top Overlay "34" at 3460,2640 h50; Top Overlay "33" at 3460,2540 h50; Top Overlay "1" at 1680,2540 h50; Top Overlay "2" at 1680,2640 h50